# EAGLE board 100mm-LVDT (EAGLE 5.12)
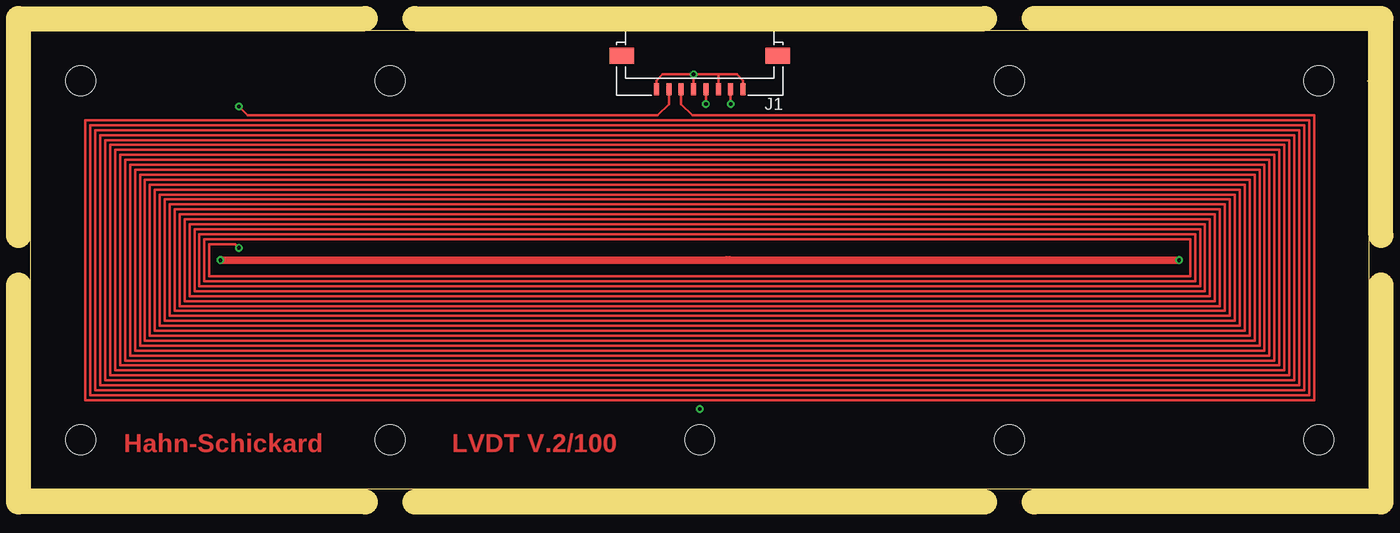
[diagram p0: board, top side]
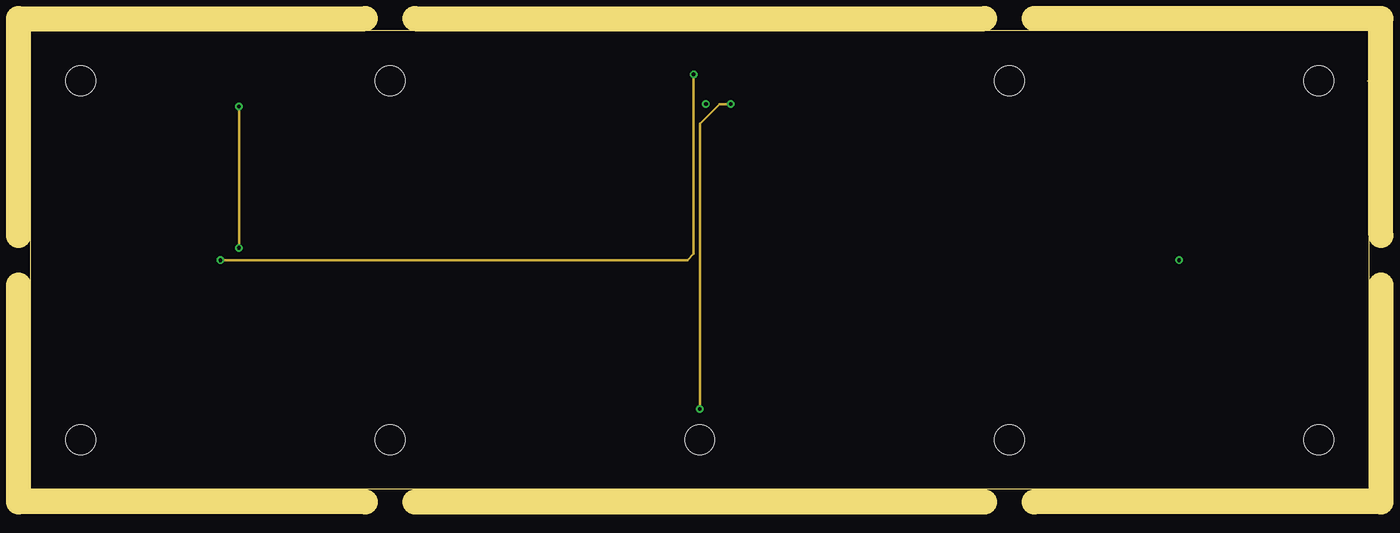
[diagram p1: board, inner layer Route2]
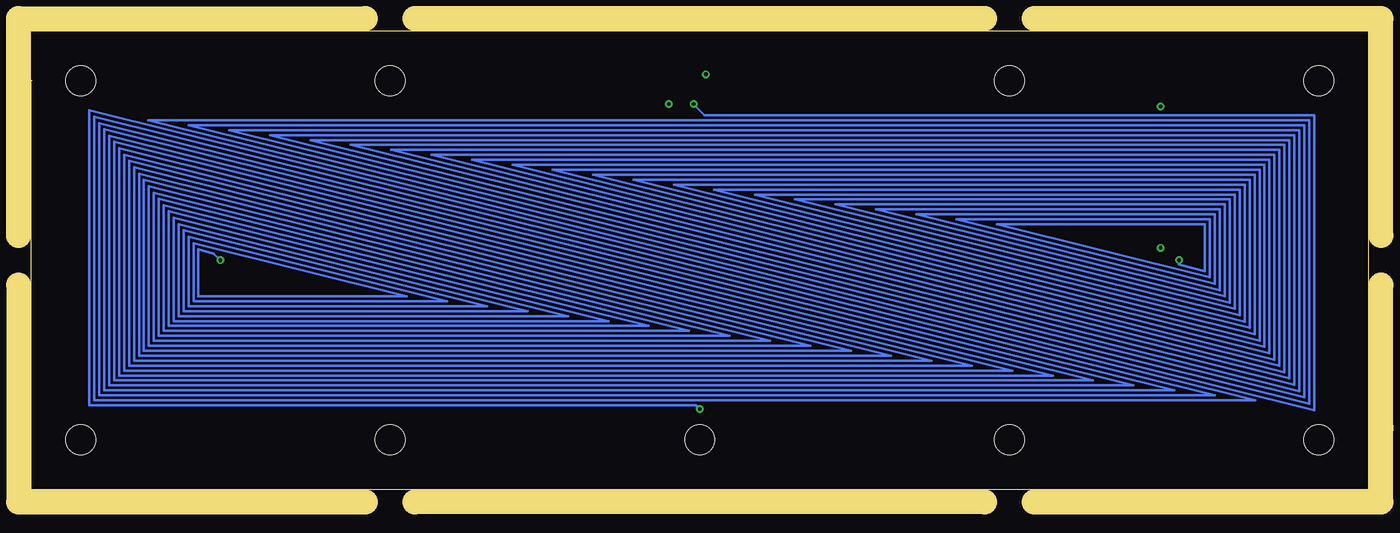
[diagram p2: board, bottom side, seen from below]

Size 108 x 38 mm. Coordinates in mm from the lower left corner, seen from the top.
Outline: 0,1 108,1 108,34
Outline: 107.9,34 108,34
Outline: 108,34 108,38 0,38 0,1
Outline: 0,0 0,1
Copper layers (1*2+15*16): Top 0.035mm / dielectric 0.4mm / Route2 0.035mm / dielectric 0.6mm / Route15 0.035mm / dielectric 0.4mm / Bottom 0.035mm
Design rules "designRules-150mu_4layer *": minimum track width 0.15mm, minimum drill 0.2mm, track to track 0.15mm, track to pad 0.15mm, pad to pad 0.15mm, via to via 0.15mm, smd to smd 0.125mm, copper to edge 0.25mm, drill to drill 0.5mm, minimum pad ring 9mil, minimum via ring 0.15mm, stop-mask expansion 3mil, vias tented up to drill 0mil, thermal gap 12mil
Holes 2.4 mm at 54,5 4,34 4,5 104,5 104,34 79,5 79,34 29,34 29,5
Milling: 11 lines

## Footprints (pad centres in the part's own frame; a part is rotated, then mirrored left to right if it is on the bottom)
200529-0080 = smd 0.4 x 1: 1 -3.5,2.7; 2 -2.5,2.7; 3 -1.5,2.7; 4 -0.5,2.7; 5 0.5,2.7; 6 1.5,2.7; 7 2.5,2.7; 8 3.5,2.7 | smd 2 x 1.3: G1 -6.3,0; G2 6.3,0

## Placement (x,y rotation side)
J1  ZIF_200529-0080  [200529-0080]  54,36 180 top

## Library data of the parts
J1 = CON_FFC_FPC

## Nets
S$2: J1.3 J1.5
S$5: J1.7

## Tracks (layer width: path | path; a pad name or v marks a point on that pad's centre or on a via)
S$2  (via drill 0.3)
  Top 0.2: 50.5,33.3 50.5,34 51,34.5 v53.5,34.5 | 57.5,33.3 57.5,34 57,34.5 55.5,34.5 | v53.5,34.5 55.5,34.5 | v56.5,32.1 56.5,33.3 | v54.5,32.1 54.5,33.3 | 55.5,34.5 J1.3 | v53.5,34.5 J1.5
  Top 0.6: 56.54,19.5 v92.7,19.5 | 56.54,19.5 56.14,19.54 55.6,19.5 | 55.6,19.5 56.4,19.54 | 55.6,19.5 56.54,19.5 | v15.3,19.5 55.6,19.5
  Route2 0.2: v54,7.49 54,30.5 55.6,32.1 v56.5,32.1 | v15.3,19.5 53,19.5 53.5,20 v53.5,34.5
  Bottom 0.2: v92.7,19.5 93.23,20.03 93.25,20.03 94.48,20.37 94.48,16.59 77.68,16.59 94.88,20.88 94.88,16.19 74.42,16.19 95.28,21.39 95.28,15.79 71.16,15.79 95.68,21.9 95.68,15.39 67.9,15.39 96.08,22.41 96.08,14.99 64.64,14.99 96.48,22.92 96.48,14.59 61.37,14.59 96.88,23.43 96.88,14.19 58.12,14.19 97.28,23.94 97.28,13.79 54.85,13.79 97.68,24.45 97.68,13.39 51.59,13.39 98.08,24.96 98.08,12.99 48.33,12.99 98.48,25.47 98.48,12.59 45.08,12.59 98.88,25.98 98.88,12.19 41.81,12.19 99.28,26.49 99.28,11.79 38.56,11.79 99.68,27 99.68,11.39 35.29,11.39 100.08,27.51 100.08,10.99 32.03,10.99 100.48,28.02 100.48,10.59 28.77,10.59 100.88,28.53 100.88,10.19 25.5,10.19 101.28,29.04 101.28,9.79 22.25,9.79 101.68,29.55 101.68,9.39 18.98,9.39 102.08,30.06 102.08,8.99 15.7,8.99 102.48,30.57 102.48,8.59 12.42,8.59 102.88,31.08 102.88,8.19 9.14,8.19 103.28,31.59 103.28,7.79 54.3,7.79 v54,7.49 | v15.3,19.5 15.3,19.19 15.24,19.13 13.2,18.62 13.2,22.4 30,22.4 12.8,18.11 12.8,22.8 33.26,22.8 12.4,17.6 12.4,23.2 36.52,23.2 12,17.09 12,23.6 39.78,23.6 11.6,16.58 11.6,24 43.04,24 11.2,16.07 11.2,24.4 46.31,24.4 10.8,15.56 10.8,24.8 49.56,24.8 10.4,15.05 10.4,25.2 52.83,25.2 10,14.54 10,25.6 56.09,25.6 9.6,14.03 9.6,26 59.35,26 9.2,13.52 9.2,26.4 62.6,26.4 8.8,13.01 8.8,26.8 65.87,26.8 8.4,12.5 8.4,27.2 69.12,27.2 8,11.99 8,27.6 72.39,27.6 7.6,11.48 7.6,28 75.65,28 7.2,10.97 7.2,28.4 78.91,28.4 6.8,10.46 6.8,28.8 82.18,28.8 6.4,9.95 6.4,29.2 85.43,29.2 6,9.44 6,29.6 88.7,29.6 5.6,8.93 5.6,30 91.98,30 5.2,8.42 5.2,30.4 95.26,30.4 4.8,7.91 4.8,30.8 98.54,30.8 4.4,7.4 4.4,31.2 53.6,31.2 v54.5,32.1
S$4  (via drill 0.3, 0.3 pad 0.3)
  Top 0.2: v16.8,31.9 17.5,31.2 50.6,31.2 51.5,32.1 51.5,33.3 | v16.8,20.5 16.5,20.8 14.4,20.8 14.4,18.2 93.6,18.2 93.6,21.2 14,21.2 14,17.8 94,17.8 94,21.6 13.6,21.6 13.6,17.4 94.4,17.4 94.4,22 13.2,22 13.2,17 94.8,17 94.8,22.4 12.8,22.4 12.8,16.6 95.2,16.6 95.2,22.8 12.4,22.8 12.4,16.2 95.6,16.2 95.6,23.2 12,23.2 12,15.8 96,15.8 96,23.6 11.6,23.6 11.6,15.4 96.4,15.4 96.4,24 11.2,24 11.2,15 96.8,15 96.8,24.4 10.8,24.4 10.8,14.6 97.2,14.6 97.2,24.8 10.4,24.8 10.4,14.2 97.6,14.2 97.6,25.2 10,25.2 10,13.8 98,13.8 98,25.6 9.6,25.6 9.6,13.4 98.4,13.4 98.4,26 9.2,26 9.2,13 98.8,13 98.8,26.4 8.8,26.4 8.8,12.6 99.2,12.6 99.2,26.8 8.4,26.8 8.4,12.2 99.6,12.2 99.6,27.2 8,27.2 8,11.8 100,11.8 100,27.6 7.6,27.6 7.6,11.4 100.4,11.4 100.4,28 7.2,28 7.2,11 100.8,11 100.8,28.4 6.8,28.4 6.8,10.6 101.2,10.6 101.2,28.8 6.4,28.8 6.4,10.2 101.6,10.2 101.6,29.2 6,29.2 6,9.8 102,9.8 102,29.6 5.6,29.6 5.6,9.4 102.4,9.4 102.4,30 5.2,30 5.2,9 102.8,9 102.8,30.4 4.8,30.4 4.8,8.6 103.2,8.6 103.2,30.8 4.4,30.8 4.4,8.2 103.6,8.2 103.6,31.2 53.4,31.2 52.5,32.1 52.5,33.3
  Route2 0.2: v16.8,20.5 v16.8,31.9

## Text on the board
Top: Hahn-Schickard | LVDT V.2/100